# Altium PCB Snap3.PcbDoc
Units mil, origin at the board's own origin, x right, y up, seen from the top; angles counter-clockwise.
Board outline 4525 x 1525 mil, 4 copper layers (Top Layer, Internal Plane 1, Internal Plane 2, Bottom Layer), stack 30.634 mil thick; 57 components, 43 nets, 239 pads, 39 vias.
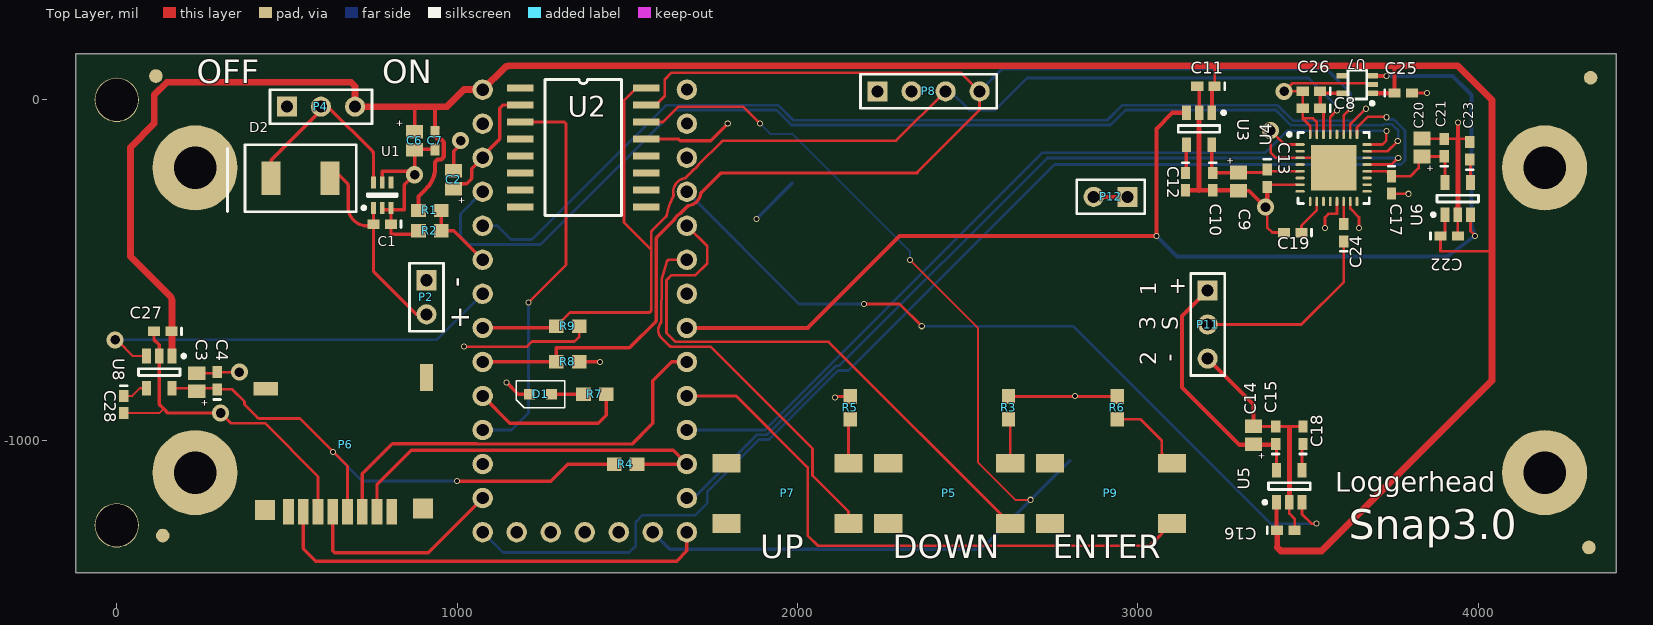
[diagram p0: Top Layer view]
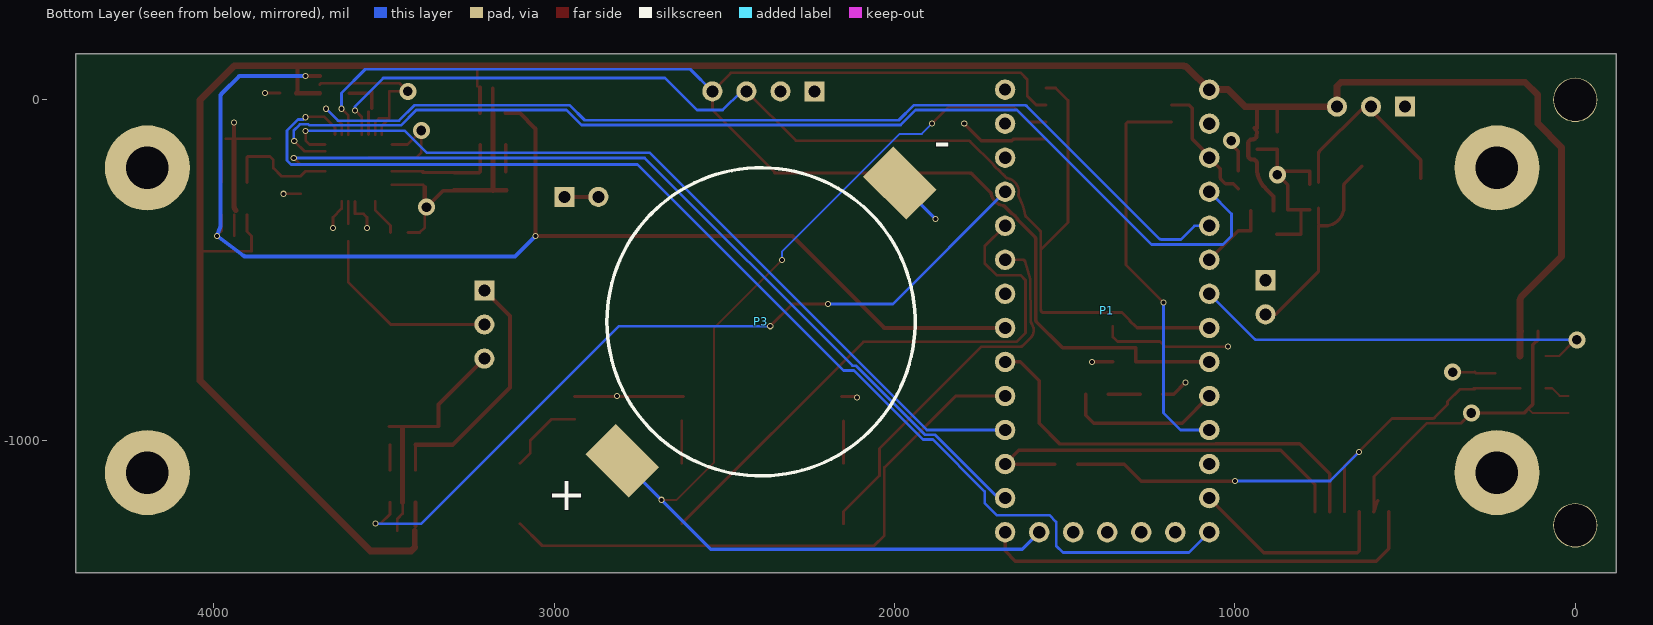
[diagram p1: Bottom Layer view, seen from below]
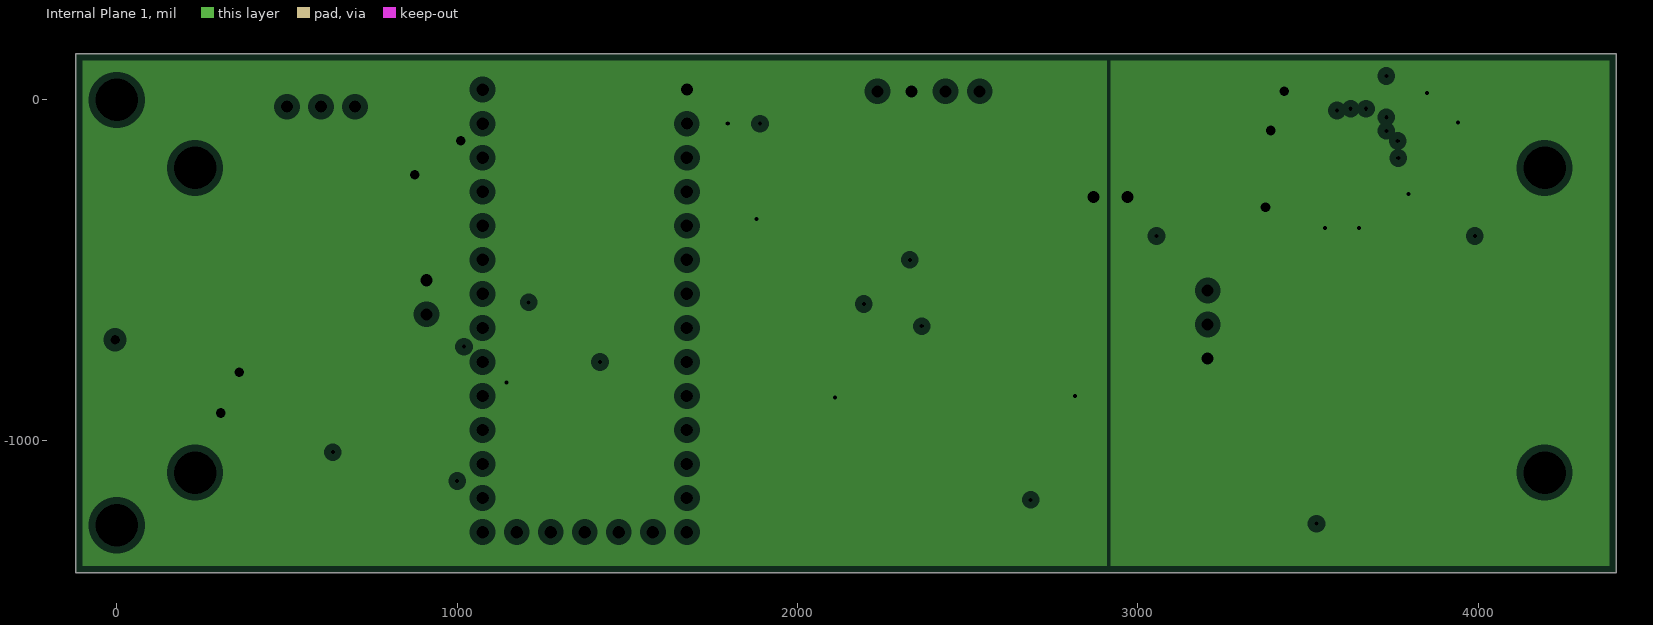
[diagram p2: Internal Plane 1, clearances drawn from the general rule]
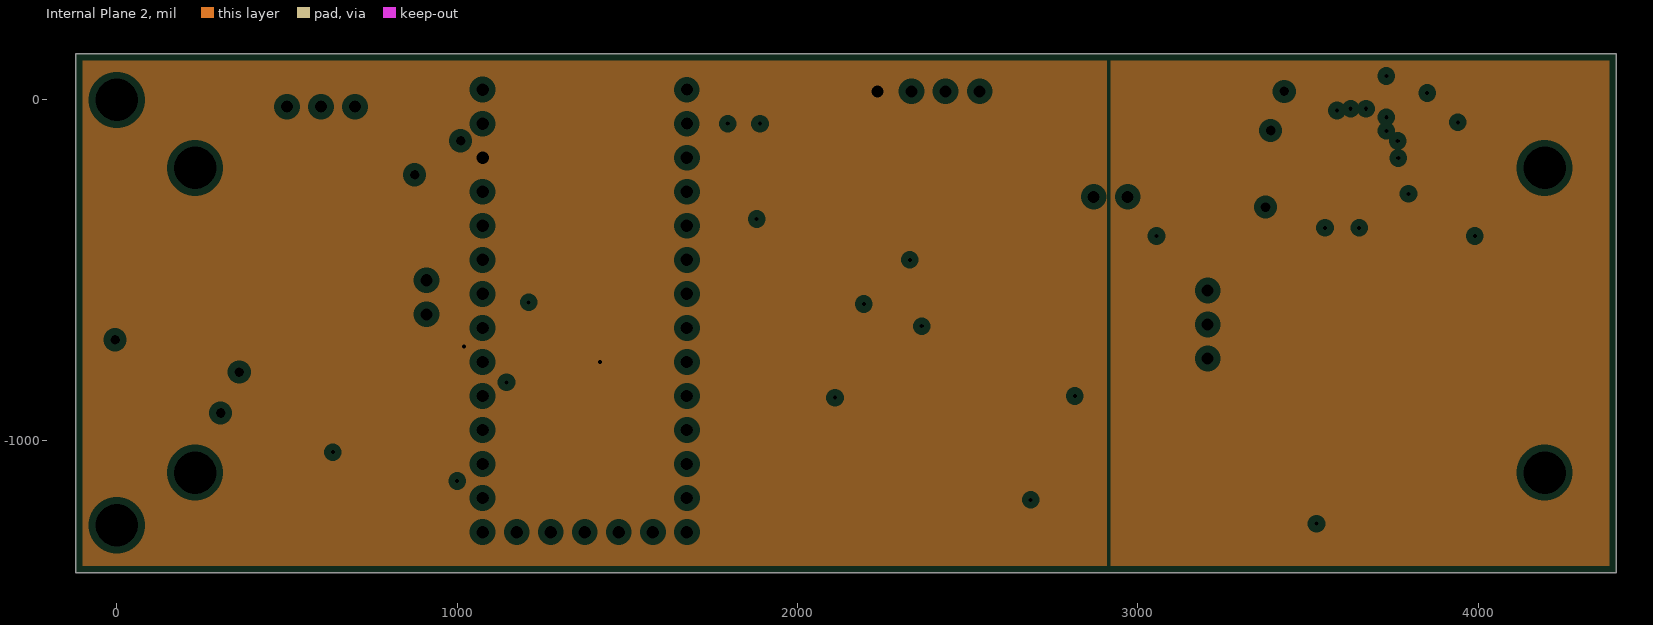
[diagram p3: Internal Plane 2, clearances drawn from the general rule]

## Layer stack, top to bottom
Top Solder: solder mask 0.4, Solder Resist, Dk 3.5
Top Layer: signal copper 1.4
Dielectric 1: core 10, FR-4, Dk 4.2
Internal Plane 1: plane copper 1.417, net (Multiple Nets)
Dielectric 3: prepreg 5, Dk 4.2
Internal Plane 2: plane copper 1.417, net VCC
Dielectric 2: core 10, Dk 4.2
Bottom Layer: signal copper 1.4
Bottom Solder: solder mask 0.4, Solder Resist, Dk 3.5

## Board outline
-120,-1390 -120,135 4405,135 4405,-1390

## Design rules (kind name [scope] priority, off if disabled: settings)
Clearance [All] p1: gap=6 ignorepadtopadclearanceinfootprint=FALSE except(0: Arc-Hole Track-Hole SMDPad-Hole THPad-Hole Via-Hole Fill-Hole Poly-Hole Region-Hole Text-Hole)
PlaneClearance [All] p1: clearance=20
PlaneConnect [All] p1: planeconnectstyle=Relief reliefexpansion=20 reliefentries=4 reliefconductorwidth=10 reliefairgap=10
PolygonConnect [All] p1: connectstyle=Relief reliefconductorwidth=10 reliefentries=4 polygonreliefangle="90 Angle" airgapwidth=10
RoutingVias [All] p1: holewidth=28 width=50 viastyle="Through Hole" minholewidth=10 minwidth=18 maxholewidth=28 maxwidth=50
SolderMaskExpansion [All] p1: expansion=4 istentingtop=FALSE
Width [All] p1: maxlimit=20 minlimit=6 preferedwidth=8
28 further rules are at their usual default settings.

## Classes and differential pairs
component class Snap3: C1 C2 C3 C4 C6 C7 C27 C28 D1 D2 P1 P2 P3 P4 P5 P6 P7 P8 P9 R1 R2 R3 R4 R5 R6 R7 R8 R9 U1 U2 U8
component class Snap3_audio: C8 C9 C10 C11 C12 C13 C14 C15 C16 C17 C18 C19 C20 C21 C22 C23 C24 C25 C26 P11 P12 U3 U4 U5 U6 U7

## Components (designator, comment, footprint, x,y, rotation, side; value= is the part's Value field where it differs from the comment)
C1 "1uF" 0402 780,-365 r180 top value=0.1uF
C2 "10uF" Tant0805 990,-235 r270 top
C3 "10uF" Tant0805 235,-830 r270 top
C4 "0.1uF" 0402 295,-825 r90 top
C6 "10uF" Tant0805 875,-120 r90 top
C7 "0.1uF" 0402 935,-120 r270 top
C8 "0.1uF" 0402 3510,-25 r180 top
C9 "10uF" Tant0805 3295,-240 r90 top
C10 "0.1uF" 0402 3220,-240 r270 top
C11 "1uF" 0402 3200,40 r180 top value=0.1uF
C12 "0.01uF" 0402 3140,-240 r270 top value=0.1uF
C13 "0.1uF" 0402 3380,-230 r270 top
C14 "10uF" Tant0805 3340,-985.16 r270 top
C15 "0.1uF" 0402 3405,-985.16 r90 top
C16 "1uF" 0402 3435,-1265 r0 top value=0.1uF
C17 "0.1uF" 0402 3745,-250 r270 top
C18 "0.01uF" 0402 3485,-985.16 r90 top value=0.1uF
C19 "0.1uF" 0402 3455,-390 r180 top
C20 "10uF" Tant0805 3835,-140 r270 top
C21 "0.1uF" 0402 3900,-140 r90 top
C22 "1uF" 0402 3915,-400 r0 top value=0.1uF
C23 "0.01uF" 0402 3975,-150 r90 top value=0.1uF
C24 "1.0uF" 0402 3605,-390 r90 top value=0.1uF
C25 "1.0uF" 0402 3780,20 r0 top value=0.1uF
C26 "1.0uF" 0402 3510,25 r180 top value=0.1uF
C27 "1uF" 0402 135,-680 r180 top value=0.1uF
C28 "0.01uF" 0402 20,-895 r270 top value=0.1uF
D1 "LED_0603" Diode0603 1245,-865 r180 top
D2 "PMEG3050EP*" Diode_PMEG3050EP 540,-230 r180 top
P1 "Teensy3.x" Teensy3.x 1675,-170 r0 bottom
P2 "Header 2" HDR1X2 910,-530 r270 top
P3 "CoinCellHolder" CoinCellHolder 2800,-1060 r135 bottom
P4 "switch EG1218" HDR1X3 500,-20 r0 top
P5 "pushbutton" SOP4 2625,-1245 r180 top
P6 "microSD Hirose" "DM3D microSD" 745,-1085 r90 top
P7 "pushbutton" SOP4 2150,-1245 r180 top
P8 "Display" HDR1X4 2235,25 r0 top
P9 "pushbutton" SOP4 3100,-1245 r180 top
P11 "HYDROPHONE" HDR1X3 3205,-560 r270 top
P12 "GND Tie" HDR1X2 2970,-285 r180 top
R1 "100k" 3-0603 920,-325 r180 top
R2 "100k" 3-0603 920,-385 r0 top
R3 "10k" 3-0603 2620,-905 r90 top
R4 "10k" 3-0603 1495,-1070 r0 top
R5 "10k" 3-0603 2155,-905 r90 top
R6 "10k" 3-0603 2940,-905 r90 top
R7 "330X" 3-0603 1405,-865 r180 top
R8 "4.7k" 3-0603 1325,-770 r0 top
R9 "4.7k" 3-0603 1325,-665 r0 top
U1 "LM66100" SC-70-6 780,-280 r90 top
U2 "DS3231" DS3231 1186.1,35 r0 top
U3 "LP3985IM5-3.3" MF05A_N 3180,-85 r270 top
U4 "SGTL5000" QFN32 3575,-200 r0 top
U5 "LP3985IM5-3.3" MF05A_N 3445,-1135.16 r90 top
U6 "LP3985IM5-3.3" MF05A_N 3940,-290 r90 top
U7 "TLV70018DCKR" TI-DCK5_V 3645,45 r180 top
U8 "ADP1712AUJZ-3.3-R7" MF05A_N 125,-800 r270 top

## Footprints (in the part's own frame and the unit in brackets; to place one, negate y for a bottom-side part, rotate by r counter-clockwise, add the part's x,y. Pads: shape width x height; smd on the part's side, far side on the other; paste and mask are expansions set on the pad)
3-0603 [mm] "Chip Resistor; Body 1.6 x 0.9 mm (LxW typ)"
  rect 1.1x1 smd: 1(-0.85,0) 2(0.85,0)
0402 [mm] "Chip Capacitor; Body 1.0 x 0.5 mm (LxW typ)"
  rect 0.9x0.7 smd: 1(-0.65,0) 2(0.65,0)
  silkscreen extent -1.4,-0.25 -1.4,0.25
CoinCellHolder [mm] "MPD BU2032SM-BT-GTR"
  rect 3.2x4.572 smd: 1(0,0) 2(29.3,0)
  silkscreen extent 3.15,-11.5 26.15,11.5
Diode0603 [mm]
  rect 0.8x0.8 smd: A(-0.825,0) K(0.825,0)
  silkscreen extent -1.83,-1 1.8,1
Diode_PMEG3050EP [mm]
  rect 1.4x2.5 smd: A(-2.2,0) K(2.2,0)
  silkscreen extent -4.15,-2.5 5.45,2.5
"DM3D microSD" [mm] "MICROSD_HIROSE Push-Pull"
  rect 1.5x1.5 smd: 0(-3.048,7.874) 0(-2.921,-3.937)
  rect 1x1.85 smd: 0(6,7.8)
  rect 2x1 smd: 0(6.85,-4.191)
  rect 1.9x0.8 smd: 1(-3.188,-1.601) 2(-3.188,-0.501) 3(-3.188,0.599) 4(-3.188,1.699) 5(-3.188,2.799) 6(-3.188,3.899) 7(-3.188,4.999) 8(-3.188,6.099)
  body extent -3.65,-4.45 7.8,7.5, height 1.55
DS3231 [mm]
  rect 1.98x0.53 smd: 1(0,0) 2(0,-1.27) 3(0,-2.54) 4(0,-3.81) 5(0,-5.08) 6(0,-6.35) 7(0,-7.62) 8(0,-8.89) 9(9.37,-8.89) 10(9.37,-7.62) 11(9.37,-6.35) 12(9.37,-5.08) 13(9.37,-3.81) 14(9.37,-2.54) 15(9.37,-1.27) 16(9.37,0)
  silkscreen extent 1.83,-9.53 7.54,0.64
HDR1X2 [mm] "Connector; Header; 2 Position"
  rect 1.5x1.5 hole 0.9: 1(0,0)
  round 1.5 hole 0.9: 2(2.54,0)
  silkscreen extent -1.27,-1.27 3.81,1.27
HDR1X3 [mm] "Connector; Header; 3 Position"
  rect 1.5x1.5 hole 0.9: 1(0,0)
  round 1.5 hole 0.9: 2(2.54,0) 3(5.08,0)
  silkscreen extent -1.27,-1.27 6.35,1.27
HDR1X4 [mm] "Connector; Header; 4 Position"
  rect 1.5x1.5 hole 0.9: 1(0,0)
  round 1.5 hole 0.9: 2(2.54,0) 3(5.08,0) 4(7.62,0)
  silkscreen extent -1.27,-1.27 8.89,1.27
MF05A_N [mm] "SOT23, 5-Leads, Body 2.9x1.6mm, Pitch 0.95mm, Lead Span 2.8mm, IPC Medium Density"
  rect 1.1x0.65 smd: 1(-1.2,0.95) 2(-1.2,0) 3(-1.2,-0.95) 4(1.2,-0.95) 5(1.2,0.95)
  silkscreen extent -1.32,-1.55 0.25,1.95, body extent -0.9,-1.55 0.9,1.55, height 1.19
QFN32 [mm]
  oval 0.7x0.2 smd: 1(-2.5,1.75) 2(-2.5,1.25) 3(-2.5,0.75) 4(-2.5,0.25) 5(-2.5,-0.25) 6(-2.5,-0.75) 7(-2.5,-1.25) 8(-2.5,-1.75) 17(2.5,-1.75) 18(2.5,-1.25) 19(2.5,-0.75) 20(2.5,-0.25) 21(2.5,0.25) 22(2.5,0.75) 23(2.5,1.25) 24(2.5,1.75)
  oval 0.2x0.7 smd: 9(-1.75,-2.5) 10(-1.25,-2.5) 11(-0.75,-2.5) 12(-0.25,-2.5) 13(0.25,-2.5) 14(0.75,-2.5) 15(1.25,-2.5) 16(1.75,-2.5) 25(1.75,2.5) 26(1.25,2.5) 27(0.75,2.5) 28(0.25,2.5) 29(-0.25,2.5) 30(-0.75,2.5) 31(-1.25,2.5) 32(-1.75,2.5)
  rect 3.4x3.4 smd paste-1.2: 33(0,0)
  silkscreen extent -3.42,-2.65 2.65,2.65, body extent -2.5,-2.5 2.5,2.5, height 1
SC-70-6 [mm] "SOT23, 6-Leads, Body 2.00x2.10mm, Pitch 0.65mm, IPC Medium Density"
  rect 0.9x0.35 smd: 1(-0.95,0.65) 2(-0.95,0) 3(-0.95,-0.65) 4(0.95,-0.65) 5(0.95,0) 6(0.95,0.65)
  silkscreen extent -1.07,-1.1 0.1,1.5, body extent -0.7,-1.07 0.7,1.08, height 1.1
SOP4 [mm]
  rect 2.1x1.4 smd: 1(0,0) 2(0,-4.5) 3(9.1,-4.5) 4(9.1,0)
Tant0805 [mil]
  rect 40x50 smd: 1(-26.5,0) 2(26.5,0)
Teensy3.x [mil]
  round 60 hole 35: 0(0,-100) GND(0,-200)
  round 60 hole 36: 1(0,0) 2(0,100) 3(0,200) 3.3V2(-200,1100) 4(0,300) 5(0,400) 6(0,500) 7(0,600) 8(0,700) 9(0,800) 10(0,900) 11(0,1000) 12(0,1100) 13(-600,1100) 14(-600,1000) 15(-600,900) 16(-600,800) 17(-600,700) 18(-600,600) 19(-600,500) 20(-600,400) 21(-600,300) 22(-600,200) 23(-600,100) A14(-500,1100) AGND(-600,-100) GND2(-300,1100) PGM(-400,1100) VBat(-100,1100) Vin(-600,-200)
  round 60 hole 36 paste+0: 3.3V(-600,0)
TI-DCK5_V [mm] "SOT23, 5-Leads, Body 2x1.25mm, Pitch 0.65mm"
  rect 0.9x0.4 smd: 1(-1.1,0.65) 2(-1.1,0) 3(-1.1,-0.65) 4(1.1,-0.65) 5(1.1,0.65)
  silkscreen extent -1.23,-1.07 0.7,1.52, body extent -0.63,-1 0.63,1, height 1.1

## Part data
C1 C4 C7 C8 C10 C11 C12 C13 C15 C16 C17 C18 C19 C21 C22 C23 C24 C25 C26 C27 C28: library part C0402, "Ceramic Chip Capacitor - Standard", PackageDocument=Mar-2001, Code_IPC="1005 [0402]", Code_JEITA=0402, ComponentLink1Description="Manufacturer Link", ComponentLink1URL=http://www.kemet.com/, ComponentLink2Description=Datasheet, ComponentLink2URL=http://www.kemet.com/kemet/web/homepage/kechome.nsf/vapubfilesname/F3102TA.pdf/$file/F3102TA.pdf, DatasheetDocument=Mar-2001, LatestRevisionDate=19-Mar-2004, LatestRevisionNote="Silkscreen size reduced.", Note="Footprint corresponds to dimensions for bulk cassette packaging. This case size has tightened tolerances.", PackageReference=0402, Published=17-Jul-2002, Publisher="Altium Limited"
C2 C3 C6 C9 C14 C20: library part Tant0805
D2: library part Diode_PMEG3050EP
P2: "Header, 2-Pin", LatestRevisionDate=17-Jul-2002, LatestRevisionNote="Re-released for DXP Platform.", Publisher="Altium Limited"
P3: Supplier Part Number 1=BU2032SM-BT-GCT-ND, Supplier 1=Digi-Key
P4 P11: library part "Header 3", "Header, 3-Pin", LatestRevisionDate=17-Jul-2002, LatestRevisionNote="Re-released for DXP Platform.", Publisher="Altium Limited"
P5 P7 P9: Supplier Part Number 1=450-1757-2-ND, Supplier 1=Digi-Key
P6: Supplier Part Number 1=HR1941DKR-ND, Supplier 1=Digi-Key
P8: library part "Header 4", "Header, 4-Pin", LatestRevisionDate=17-Jul-2002, LatestRevisionNote="Re-released for DXP Platform.", Publisher="Altium Limited"
P12: library part "Header 2", "Header, 2-Pin", LatestRevisionDate=17-Jul-2002, LatestRevisionNote="Re-released for DXP Platform.", Publisher="Altium Limited"
R1 R2 R3 R4 R5 R6 R7 R8 R9: library part ERJ3RK, "Precision Thick Film Chip Resistor, 10 Ohm to 1M Ohm Range, 1% and 0.5% Tolerance, 0603 Size, 0.063 W", PackageDocument=Mar-2003, Code_IPC="1608 [0603]", ComponentLink1Description="Manufacturer Link", ComponentLink1URL=http://www.panasonic.com/industrial/components/resistive_products.htm, ComponentLink2Description=Datasheet, ComponentLink2URL=http://www.panasonic.com/industrial/components/pdf/AOA0000CE2.pdf, LatestRevisionDate=19-Mar-2004, LatestRevisionNote="Silkscreen size reduced.", PackageReference=3-0603, Published=17-Dec-2003, Publisher="Altium Limited"
U2: Supplier Part Number 1=DS3231S#-ND, Supplier 1=Digi-Key
U3 U5 U6: "Micropower, 150mA Low-Noise Ultra Low-Dropout CMOS Voltage Regulator", DigiKeyPartNumber=LP3985IM5-3.3CT-ND, Manufacturer="National Semiconductor", PackageTopMarking=LDQB*XTT, PowerWise=N, ComponentLink1Description="LP3985 Datasheet", ComponentLink1URL=http://www.national.com/ds/LP/LP3985.pdf, ComponentLink2Description="LP3985 Web Page", ComponentLink2URL=http://www.national.com/pf/LP/LP3985.html, ComponentLink3Description="MF05A Package Page", ComponentLink3URL=http://www.national.com/packaging/folders/mf05a.html, CompType="LDO IC", DatasheetVersion=Aug-2005, PackageDescription="Molded SOT-23, .115 x .063 x .040 in Body, 5 Lead, .0375 in Pitch", PackageReference=MF05A, PackageVersion="revD, Aug-2008", PartNumber=LP3985IM5-3.3, PinCount=5, Published=4-Dec-2008, Publisher="Altium Limited", RoHS=O
U7: "Single Output LDO, 200 mA, Fixed 1.8 V Output, 2 to 5.5 V Input, with Low IQ, 5-pin SC70 (DCK), -40 to 125 degC, Green (RoHS & no Sb/Br)", Manufacturer="Texas Instruments", Supplier Part Number 1=296-32409-2-ND, Accuracy(%)=2, Code_JEDEC=MO-203, ComponentLink1Description="Manufacturer URL", ComponentLink1URL=http://www.ti.com/, ComponentLink2Description=Datasheet, ComponentLink2URL=http://www.ti.com/general/docs/lit/getliterature.tsp?genericPartNumber=TLV70018&fileType=pdf, ComponentLink3Description="Package Specification", ComponentLink3URL=http://www.ti.com/litv/pdf/mpds025f, DatasheetVersion=SLVSA00D, Eco-Plan="Green (RoHS & no Sb/Br)", Fixed Output Options(V)=1.8, Iout(Max)(A)=0.2, Iq(Typ)(mA)=0.03, Mounting Technology="Surface Mount", PackageDescription="5-Pin Plastic Small-Outline, Body 2 x 1.25 mm, Pitch 0.65 mm", PackageReference=DCK5, PackageVersion=4093553-3/G, PartNumber=TLV70018DCKR, SubFamily="Single Channel LDO", Supplier 1=Digi-Key, Supplier 2=Digi-Key, Supplier 3=Digi-Key, Supplier 4=Newark, Supplier 5=Mouser, Supplier Part Number 2=296-32409-1-ND, Supplier Part Number 3=296-32409-6-ND, Supplier Part Number 4=55R7461, Supplier Part Number 5=595-TLV70018DCKR, Vdo(Typ)(mV)=175, Vin(Max)(V)=5.5, Vin(Min)(V)=2, Vout Adj(Max)(V)=1.8, Vout Adj(Min)(V)=1.8
U8: library part LP3985IM5-3.3, "Micropower, 150mA Low-Noise Ultra Low-Dropout CMOS Voltage Regulator", DigiKeyPartNumber=LP3985IM5-3.3CT-ND, Manufacturer="National Semiconductor", PackageTopMarking=LDQB*XTT, PowerWise=N, ComponentLink1Description="LP3985 Datasheet", ComponentLink1URL=http://www.national.com/ds/LP/LP3985.pdf, ComponentLink2Description="LP3985 Web Page", ComponentLink2URL=http://www.national.com/pf/LP/LP3985.html, ComponentLink3Description="MF05A Package Page", ComponentLink3URL=http://www.national.com/packaging/folders/mf05a.html, CompType="LDO IC", DatasheetVersion=Aug-2005, PackageDescription="Molded SOT-23, .115 x .063 x .040 in Body, 5 Lead, .0375 in Pitch", PackageReference=MF05A, PackageVersion="revD, Aug-2008", PartNumber=LP3985IM5-3.3, PinCount=5, Published=4-Dec-2008, Publisher="Altium Limited", RoHS=O

## Free pads (board coordinates)
  round 130 hole 125: 0(0,-1250) 0(0,0)
  round 40 smd paste-20 mask+5: 0(115,70) 0(135,-1280) 0(4325,-1315) 0(4330,65)
  round 250 hole 125: 0(230,-200) 1(4195,-200) 2(4195,-1095) 3(230,-1095)

## Via types
v1: diameter 18, hole 12, Top Layer to Bottom Layer, tented both sides, 31 vias
v2: diameter 50, hole 28, Top Layer to Bottom Layer, tented both sides, 7 vias
v3: diameter 50, hole 28, Top Layer to Bottom Layer, 1 vias

## Nets (pads, with @x,y where several pads share a name; then routed paths per layer and width w, separated by ;. In a path a pad name is that pad's centre, name@x,y a point inside that pad or via, vN(x,y) a via of type N, cw(c..) or ccw(c..) an arc to the next point about the centre after c; other vN are vias at no path point)
AGND: C8.2 C9.1 C10.2 C11.2 C12.2 C13.2 C14.1 C15.2 C16.2 C17.2 C18.2 C19.2 C20.1 C21.2 C22.2 C23.2 C25.2 C26.2 P11.3 P12.1 U3.2 U4.1 U4.3 U4.7 U4.13 U4.15 U4.31 U4.32 U4.33 U5.2 U6.2 U7.2 | length 3159.2
  Top Layer w8: C14.1 3340.91,-959.57 C15.2 3439.57,-959.57 ; v2(3375,-315) 3380,-310 3380,-375 3395,-390 C19.2 ; C13.2@3385,-249.21 U4.7 ; U5.2 3445,-1215 3460.59,-1230.59 C16.2 ; 3445,-965 3439.57,-959.57 ; U4.1 3431.1,-131.1 v2(3390,-90) 3390,-154.41 3406.06,-170.47 U4.3 U4.33@3545.47,-170.47 ; C18.2 3439.57,-959.57 ; U4.32 3506.1,-76.1 3484.41,-54.41 ; U4.31 3525.79,-65.79 3514.41,-54.41 3484.41,-54.41 ; v1@3550,-375 3550,-345 3560.16,-334.84 3584.84,-334.84 U4.13 ; U4.15 3624.21,-319.21 3650,-345 v1@3650,-380 ; U7.2 3684.53,48.78 3453.78,48.78 v2(3430,25) C26.2 C8.2 3484.41,-54.41 ; C17.2 v1@3794.41,-275.59 ; C25.2 v1(3850,20) ; C20.1 3835.91,-114.41 C21.2 3940,-114.41 C23.2@3965,-114.41 ; C22.2@3940,-399.41 U6.2
  Top Layer w10: U3.2 C11.2@3180,34.41 ; C9.1 3326.5,-266.5 v2(3375,-315)
  Top Layer w12: C12.2 3180,-265.59 C10.2 C9.1@3294.09,-265.59 ; P11.3 3340,-895 C14.1 ; v2@3380,-310 C13.2 ; 3940,-114.41 v1@3940,-65
  Top Layer w15: 3180,-265.59 U3.2 ; U5.2 3445,-965 ; U6.2@3935,-325 3935.61,-324.39 ccw(c3925,-313.79) 3940,-313.79 3940,-114.41
  other v1: 3550,-376 3650,-376 3795,-276 3940,-66
BATT_BACK: P1.VBat P3.1 U2.14 | length 3226.5
  Top Layer w6: v1(2330,-470) 2530,-670 2530,-1065 2640,-1175 v1(2685,-1175)
  Top Layer w8: U2.14 1605,-65 1650,-20 1840,-20 v1(1890,-70)
  Bottom Layer w6: v1(1890,-70) 1920,-100 1985,-100 2330,-445 v1(2330,-470)
  Bottom Layer w10: P1.VBat 1625,-1320 2540,-1320 P3.1
BCLK: P1.9 U4.24 | length 2505.3
  Top Layer w8: U4.24 3718.9,-131.1 3730,-120 v1@3730,-95
  Bottom Layer w8: P1.9 1905,-970 2720,-155 3374.5,-155 3438.5,-91 v1(3730,-91)
CS1: P1.10 P6.2 R4.2 | length 1196.3
  Top Layer w10: P6.2 764.72,-1129.72 865.45,-1029 1091.98,-1029 1092.98,-1030 1635,-1030 P1.10 R4.2
DGND: C1.1 C2.1 C3.1 C4.2 C6.1 C7.2 C27.2 C28.2 D1.K P1.GND P2.1 P3.2 P6.6 P8.2 P12.2 R2.1 R3.2 R5.2 R6.2 U1.2 U1.3 U1.5 U2.13 U8.2 | length 2713.3
  Top Layer w6: C28.2 124.41,-920.59 137.5,-907.5
  Top Layer w8: C3.1 290.91,-803.5 C4.2 295.59,-800 v2(360,-800) ; v2(305,-920) 335,-950 435,-950 591.5,-1106.5 P6.6
  Top Layer w10: C27.2 109.41,-704.41 125,-720 U8.2 125,-895 137.5,-907.5 150,-920 v2(305,-920) ; P6.6@580.75,-1178.11 P6.6 ; U1.2@780,-322.4 U1.3@805.59,-322.4 ; U1.5@780,-247.6 U1.5 780,-210 865,-210 v3(875,-220) ; C6.1 v3(875,-220) ; C6.1@875.91,-145.59 C7.2 ; R2.1@876.54,-395 805.59,-395 C1.1 U1.3@805.59,-322.4 ; C2.1 990,-150.82 1010,-130.82 v2(1010,-120) ; v1(1145,-830) 1180,-865 D1.K ; U2.13 1650,-115 1655,-120 1745,-120 v1(1795,-70) v1@1795,-65 ; v1@2113.46,-871.54 R5.2 ; R3.2 R6.2 ; U1.3@805.59,-322.4 845,-322.4 845,-250 v3(875,-220)
  Bottom Layer w10: v1(1880,-350) 1880,-348.64 P3.2
  other v1: 2110,-875 2815,-870
DN-TX: P1.3 P5.1 | length 1672.5
  Top Layer w8: P1.3 1735,-430 1735,-480 1700,-515 1630,-515 1615,-530 1615,-685 1641,-711 2091,-711 P5.1
ENT-RST: P1.8 P9.1 | length 1751.3
  Top Layer w8: P1.8 1820,-870 2030,-1080 2030,-1280 2060,-1310 3035,-1310 P9.1
HYDRO_EN: P1.2 U5.3 | length 2342.9
  Top Layer w8: v1(2195,-600) 2300,-600 v1(2365,-665) ; U5.3 3482.4,-1217.4 3510,-1245 v1(3525,-1245)
  Bottom Layer w8: P1.2 2005,-600 v1(2195,-600) ; v1(2365,-665) 2810,-665 3390,-1245 v1(3525,-1245)
I2SDIN: P1.22 U4.26 | length 2939.2
  Top Layer w8: U4.26 3624.21,-70.79 v1@3670,-25
  Bottom Layer w8: P1.22 1118.43,-370 1158.43,-410 1216.69,-410 ccw(c1216.69,-402) 1222.33,-407.67 1611.67,-18.33 cw(c1617.31,-24) 1617.27,-16 ; 1617.31,-16 1943.63,-16 1987.63,-60 2910,-60 2954,-16 3411,-16 3456,-61 3635,-61 v1(3670,-26)
I2SDOUT: P1.13 U4.25 | length 3552
  Top Layer w8: U4.25 3643.9,-81.1 3675,-50 v1@3730,-50
  Bottom Layer w8: P1.13 1135,-1330 1505,-1330 1525,-1310 1525,-1240 1545,-1220 1700,-1220 1735,-1185 1735,-1150 1887,-998 1916.6,-998 2119.6,-795 2150,-795 2755,-190 3772.87,-190 3785,-177.87 3785,-90.2 3752.8,-58 3737,-58 v1(3730,-51)
IN_L: C24.2 U4.14 | length 65.5
  Top Layer w8: C24.2@3604.53,-363.94 U4.14
INT: P1.16 U2.3 | length 1187.4
  Top Layer w8: U2.3 1315.31,-65 1320,-69.69 1320,-485 v1(1210,-595)
  Bottom Layer w8: P1.16 1160,-970 1210,-920 v1(1210,-595)
LED1: P1.17 R7.1 | length 467.9
  Top Layer w10: P1.17 1155,-950 1415,-950 1438.46,-926.54 R7.1
LRCLK: P1.23 U4.23 | length 3278.7
  Top Layer w8: U4.23 3734.21,-150.79 v1@3760,-125
  Bottom Layer w8: P1.23 1010,-335 1010,-400 1035,-425 1245,-425 1640,-30 1937.83,-30 1981.83,-74 2919.75,-74 2963.75,-30 3405,-30 3450,-75 3719.13,-75 3722.13,-72 3747,-72 3765,-90 3765,-119.58 v1(3763.43,-121.16)
MCLK: P1.11 U4.21 | length 2603.7
  Top Layer w8: U4.21 3744.84,-190.16 v1@3765,-170
  Bottom Layer w8: P1.11 1695.2,-1170 1881.2,-984 1910.8,-984 2113.8,-781 2124,-781 2734,-171 v1(3765,-171)
MISO: P1.12 P6.7 | length 1317.2
  Top Layer w10: P6.7 548.19,-1318.19 585,-1355 1645,-1355 1675,-1325 P1.12
MOSI: P1.7 P6.3 | length 1275.7
  Top Layer w10: P6.3 721.42,-1098.58 810,-1010 1057.02,-1010 1058.02,-1011 1514,-1011 1575,-950 1575,-825 1630,-770 P1.7
NetC12_1: C12.1 U3.4 | length 79.6
  Top Layer w10: C12.1@3142.6,-211.81 U3.4
NetC18_1: C18.1 U5.4 | length 74.6
  Top Layer w8: U5.4 C18.1@3482.4,-1013.35
NetC19_1: C19.1 U4.10 | length 110.3
  Top Layer w8: C19.1 3480.59,-369.41 3525.79,-324.21 U4.10
NetC23_1: C23.1 U6.4 | length 64.8
  Top Layer w8: U6.4 C23.1@3977.4,-177.99
NetC24_1: C24.1 P11.2 | length 571.2
  Top Layer w8: P11.2 3480,-660 3605,-535 C24.1
NetC28_1: C28.1 U8.4 | length 76.8
  Top Layer w6: C28.1 45.59,-869.41 67.76,-847.24 U8.4
NetD1_A: D1.A R7.2 | length 94.1
  Top Layer w10: D1.A R7.2
NetP5_2: P5.2 R3.1 | length 124.4
  Top Layer w8: P5.2 R3.1@2625,-943.46
NetP7_2: P7.2 R5.1 | length 124.4
  Top Layer w8: P7.2 R5.1@2150,-943.46
NetP9_2: P9.2 R6.1 | length 235.7
  Top Layer w8: R6.1 3008.46,-938.46 3070,-1000 3070,-1037.83 P9.2
POW: D2.K P4.2 U1.6 | length 568.2
  Top Layer w8: P4.2@600,-30 P4.2
  Top Layer w10: D2.K 453.39,-176.61 P4.2@600,-30 ; P4.2 615.86,-20 cw(c615.86,-30) 622.88,-22.88 751.5,-151.5 cw(c744.41,-158.55) 754.41,-158.51 ; U1.6 754.41,-158.55
POW1: P1.20 U8.3 | length 1248
  Top Layer w6: v2@5,-710 47.76,-752.76 U8.3
  Top Layer w8: v2(-5,-705) 0,-705 v2@5,-710
  Bottom Layer w8: v2(-5,-705) 936.73,-705 ccw(c936.69,-697) 942.34,-702.66 P1.20
SCK: P1.14 P6.5 | length 622.9
  Top Layer w10: P6.5 634.8,-1324.8 640,-1330 915,-1330 P1.14
SCL: P1.19 P8.3 R9.1 U2.16 U4.29 | length 3701.6
  Top Layer w8: R9.1 1308.17,-650.22 1309.19,-649.31 1307.37,-649.31 cw(c1313.88,-653.97) 1308.2,-648.33 1331.54,-625 1562,-625 ccw(c1562,-617) 1570,-617 1570,-440 ; U2.16 1526.46,35 1490,-1.46 1490,-360 1570,-440 ; 1709.72,-190.27 1777.67,-122.33 cw(c1783.31,-128) 1783.27,-120 ; 1709.73,-190.28 ccw(c1715.41,-195.9) 1708.7,-191.55 cw(c1675,-170) 1696.56,-203.69 ccw(c1700.9,-210.41) 1695.27,-204.73 1680.8,-219.2 ccw(c1851.12,-389.51) 1672.28,-228.16 cw(c1666.36,-222.78) 1667.84,-230.65 ccw(c1675,-270) 1635.78,-277.87 cw(c1627.93,-279.42) 1635.12,-282.93 ccw(c1851.12,-389.51) 1615.58,-339.17 cw(c1607.76,-337.46) 1613.45,-343.09 1572.34,-384.19 ccw(c1578,-389.85) 1570,-389.85 1570,-440 ; 1783.31,-120 2290,-120 P8.3 ; U4.29 3565.16,-49.84 v1@3585,-30
  Top Layer w10: P1.19 R9.1@1286.54,-670
  Bottom Layer w8: P8.3 2450,25 2505,-30 2580,-30 2674.1,64.1 3502.5,64.1 3502.5,62.5 3585,-20 v1(3585,-31)
SDA: P1.18 P8.4 R8.1 U2.15 U4.27 | length 4332
  Top Layer w8: U2.15 1583.54,-15 1610,11.46 1610,60 1630,80 2476.69,80 cw(c2476.69,72) 2482.34,77.66 P8.4 2535,-30 2352.5,-212.5 ; U4.27 3604.53,-45.47 v1@3620,-30
  Top Layer w10: P1.18 R8.1 1291.54,-728.46 1502.39,-728.46 ccw(c1502.39,-718.46) 1509.44,-725.56 1582.07,-652.93 ccw(c1575,-645.86) 1585,-645.86 1585,-409.14 cw(c1595,-409.14) 1587.93,-402.07 1637.27,-352.73 ccw(c1630.17,-345.69) 1638.94,-350.49 cw(c1675,-370) 1655.5,-333.93 ccw(c1650.69,-325.17) 1657.73,-332.27 1676.89,-313.11 cw(c1683.93,-320.21) 1682.16,-310.37 ccw(c1675,-270) 1715.37,-277.14 cw(c1725.21,-278.93) 1718.11,-271.89 1772.09,-217.91 cw(c1779.14,-225) 1779.1,-215 ; 1779.14,-215 2350,-215 2352.5,-212.5
  Bottom Layer w8: P8.4 2600,90 3555,90 3625,20 v1(3625,-26)
SGTL_EN: P1.6 U3.3 U6.3 U7.3 | length 3691.5
  Top Layer w8: U6.3 3977.4,-384.7 3990,-397.29 v1(3990,-400)
  Top Layer w12: P1.6 2030,-670 2300,-400 v1(3055,-400) 3055,-85 3102.24,-37.76 U3.3 ; U7.3 v1@3729.41,70.59
  Bottom Layer w12: v1(3055,-400) 3115,-460 3905.85,-460 ccw(c3905.85,-448) 3913.2,-457.49 cw(c3920.55,-466.97) 3913.38,-457.35 v1(3990,-400) 3980.6,-371.53 cw(c3992,-367.78) 3980,-367.83 3979.97,10.06 ccw(c3967.97,10.06) 3976.53,18.47 3976.49,18.51 3925,70 v1(3730,70)
UP-RX: P1.4 P7.1 | length 1134.6
  Top Layer w8: P1.4 1623.31,-470 ccw(c1623.31,-478) 1615.61,-475.85 1601.52,-526.23 ccw(c1615,-530) 1601,-529.88 1600,-646.07 cw(c1575,-645.86) 1596.09,-659.29 ccw(c1623.29,-676.77) 1600.35,-699.56 1623.48,-722.69 ccw(c1629.11,-717) 1629.07,-725 1745,-725 2044,-1024 2044,-1104 2150,-1210 P7.1
V_BATT: C1.2 D2.A P2.2 U1.1 | length 637.1
  Top Layer w8: C1.2 U1.1
  Top Layer w10: D2.A@626.61,-195 677.07,-245.46 cw(c670,-252.53) 680,-252.53 680,-315 ccw(c735,-315) 735,-370 754.41,-370 754.41,-504.41 880,-630 P2.2
VA: C9.2 C10.1 C13.1 U3.5 U4.5 | length 335.2
  Top Layer w8: C13.1@3385.43,-209.84 U4.5
  Top Layer w10: C10.1@3217.4,-211.81 U3.5 ; C10.1 C9.2@3294.09,-214.41 ; C9.2 C13.1@3385.43,-213.5
VCC: C2.2 P1.3.3V P8.1 R8.2 R9.2 U2.2 | length 813.9
  Top Layer w8: v1(1020,-725) 1205,-725 1220,-710 1345,-710 1358.46,-696.54 R9.2
  Top Layer w10: C2.2 1005,-246.5 1024.36,-246.5 ccw(c1024.36,-236.5) 1031.41,-243.59 1039.82,-235.18 ccw(c1032.72,-228.14) 1042.72,-228.14 1042.72,-202.28 P1.3.3V 1075,-165 1125,-115 1125,-25 1135,-15 U2.2 ; R8.2 v1(1420,-770)
VCC1: C3.2 C4.1 P6.4 R4.1 U8.5 | length 1638.2
  Top Layer w8: U8.5 297.24,-847.24 297.69,-847.66 C4.1@300.89,-850.59 ; C4.1 C4.1@300.89,-850.59 ; P6.4 678.11,-1075.71 538.4,-936 419.26,-936 cw(c419.31,-928) 413.69,-933.69 375,-895 375,-886.18 339.41,-850.59 C4.1@300.89,-850.59
  Top Layer w10: v1(1000,-1120) 1275,-1120 1325,-1070 R4.1
  Bottom Layer w8: v1(635,-1035) 720,-1120 v1(1000,-1120)
VDDD: C8.1 C26.1 U4.30 U7.5 | length 177.2
  Top Layer w8: U4.30 C8.1@3545.47,-34.88
  Top Layer w10: C8.1 C26.1 ; C26.1@3541.18,19.41 U7.5
VDDIO: C17.1 C20.2 C21.1 U4.20 U6.5 | length 348.2
  Top Layer w8: U4.20 3730.43,-209.84 C17.1 3800.59,-224.41 3825,-200 3825,-176.5 C20.2 3900.91,-166.5 3902.6,-168.19 U6.5
VH: C14.2 C15.1 P11.1 U5.5 | length 738
  Top Layer w8: U5.5 C15.1@3407.6,-1013.35
  Top Layer w12: P11.1 3130,-635 3130,-845 3298.35,-1013.35 C15.1@3407.6,-1013.35
VIN: C6.2 C7.1 C11.1 C16.1 C22.1 C25.1 C27.1 P1.Vin P4.3 R1.2 U3.1 U5.1 U6.1 U7.1 U8.1 | length 7704.4
  Top Layer w8: C11.1 3225.59,94.41 ; U6.1 3902.6,-386.81 C22.1 3889.41,-444.41 4034.41,-444.41 4040,-450
  Top Layer w10: C6.2 875,-25 ; 880,-25 880,-20
  Top Layer w12: R1.2 886.54,-283.46 910.21,-259.79 ccw(c850.5,-200) 935,-199.98 935,-187.31 cw(c947,-187.31) 947,-175.31 948.78,-175.31 ccw(c948.78,-163.31) 960.78,-163.31 960.78,-127.87 ccw(c948.78,-127.87) 948.78,-115.87 947.69,-115.87 cw(c947.69,-103.87) 936.24,-107.48 936.24,-106.13 C7.1 942.78,-82.69 935.01,-82.69 cw(c947,-82.17) 935,-82.25 935,-20 ; U3.1 C11.1@3217.4,36.81 ; C16.1@3407.6,-1252.17 U5.1 ; U7.1 C25.1@3758.82,19.41 ; C25.1 3754.41,90.59
  Top Layer w15: 3409.41,-1314.41 C16.1
  Top Layer w20: U8.1 162.4,-683.78 C27.1 162.4,-676.22 162.4,-590.69 ccw(c142.4,-590.69) 156.54,-576.54 40,-460 40,-140 110,-70 110,14.09 147.63,51.72 688.28,51.72 700,40 P4.3 880,-20 935,-20 970,-20 1020,30 P1.Vin 1139.18,94.18 cw(c1153.28,80) 1153.22,100 1153.28,100 3940,100 4040,0 4040,-450 4040,-825 3540,-1325 3420,-1325 3409.41,-1314.41
VSENS: P1.21 R1.1 R2.2 | length 216.7
  Top Layer w10: R1.1 R2.2 990,-385 P1.21
pads on no net: P1.0 P1.1 P1.3.3V2 P1.5 P1.15 P1.A14 P1.AGND P1.GND2 P1.PGM P4.1 P5.3 P5.4 P6.0 P6.1 P6.8 P7.3 P7.4 P9.3 P9.4 U1.4 U2.1 U2.4 U2.5 U2.6 U2.7 U2.8 U2.9 U2.10 U2.11 U2.12 U4.2 U4.4 U4.6 U4.8 U4.9 U4.11 U4.12 U4.16 U4.17 U4.18 U4.19 U4.22 U4.28 U7.4
copper on no net: | length 90
  Top Layer w12: 2870,-285 2960,-285

## Polygon pours and split planes (outlines as drawn)
AGND on Internal Plane 1 (split plane): 4384.9,-1369.9 2920.1,-1369.9 2920.1,114.9 4384.9,114.9
DGND on Internal Plane 1 (split plane): 2909.9,-1369.9 -99.9,-1369.9 -99.9,114.9 2909.9,114.9
VA on Internal Plane 2 (split plane): 4384.9,-1369.9 2920.1,-1369.9 2920.1,114.9 4384.9,114.9
VCC on Internal Plane 2 (split plane): 2909.9,-1369.9 -99.9,-1369.9 -99.9,114.9 2909.9,114.9

## Other copper
Internal Plane 1 (plane layer: these items are gaps in the copper):
  lines w10: 2915,-1390 2915,135
Internal Plane 2 (plane layer: these items are gaps in the copper):
  lines w10: 2915,-1390 2915,135

## Silkscreen, mask and mechanical layers (free items; w line width, h text height)
Top Overlay:
  text "OFF" at 235,25 h120
  text "ON" at 780,25 h120
  text "-" at 1025,-550 h60 r90
  text "1" at 3070,-575 h80 r90
  text "+" at 3090,-585 h80
  text "+" at 975,-665 h60
  text "3" at 3069.14,-677.46 h80 r90
  text "S" at 3135,-677.46 h80 r90
  text "-" at 3130,-770 h80 r90
  text "2" at 3070,-780 h80 r90
  text "Loggerhead" at 3580,-1170 h100
  text "Snap3.0" at 3620,-1320 h150
  text "UP" at 1890,-1370 h120
  text "DOWN" at 2280,-1370 h120
  text "ENTER" at 2750,-1370 h120
Bottom Overlay:
  text "-" at 1835,-170 h100
  text "+" at 2905,-1205 h100
Mechanical 1:
  the board outline again, w10

## Text inside footprints (layer, text, board x,y; h text height)
C2: Top Overlay "+" at 1005,-285 h19.68 r270
C3: Top Overlay "+" at 250,-880 h19.68 r270
C6: Top Overlay "+" at 840,-80 h19.68 r90
C9: Top Overlay "+" at 3280,-190 h19.68 r90
C14: Top Overlay "+" at 3355,-1035.16 h19.68 r270
C20: Top Overlay "+" at 3850,-190 h19.68 r270